# Altium PCB DebugBoard_v3.PcbDoc
Units mm, origin at the board's own origin, x right, y up, seen from the top; angles counter-clockwise.
Board outline 33.02 x 38.74 mm, 2 copper layers (Top Layer, Bottom Layer), stack 2.12 mm thick; 14 components, 13 nets, 68 pads, 79 vias.
Unrouted connection lines stored in the file: 18.
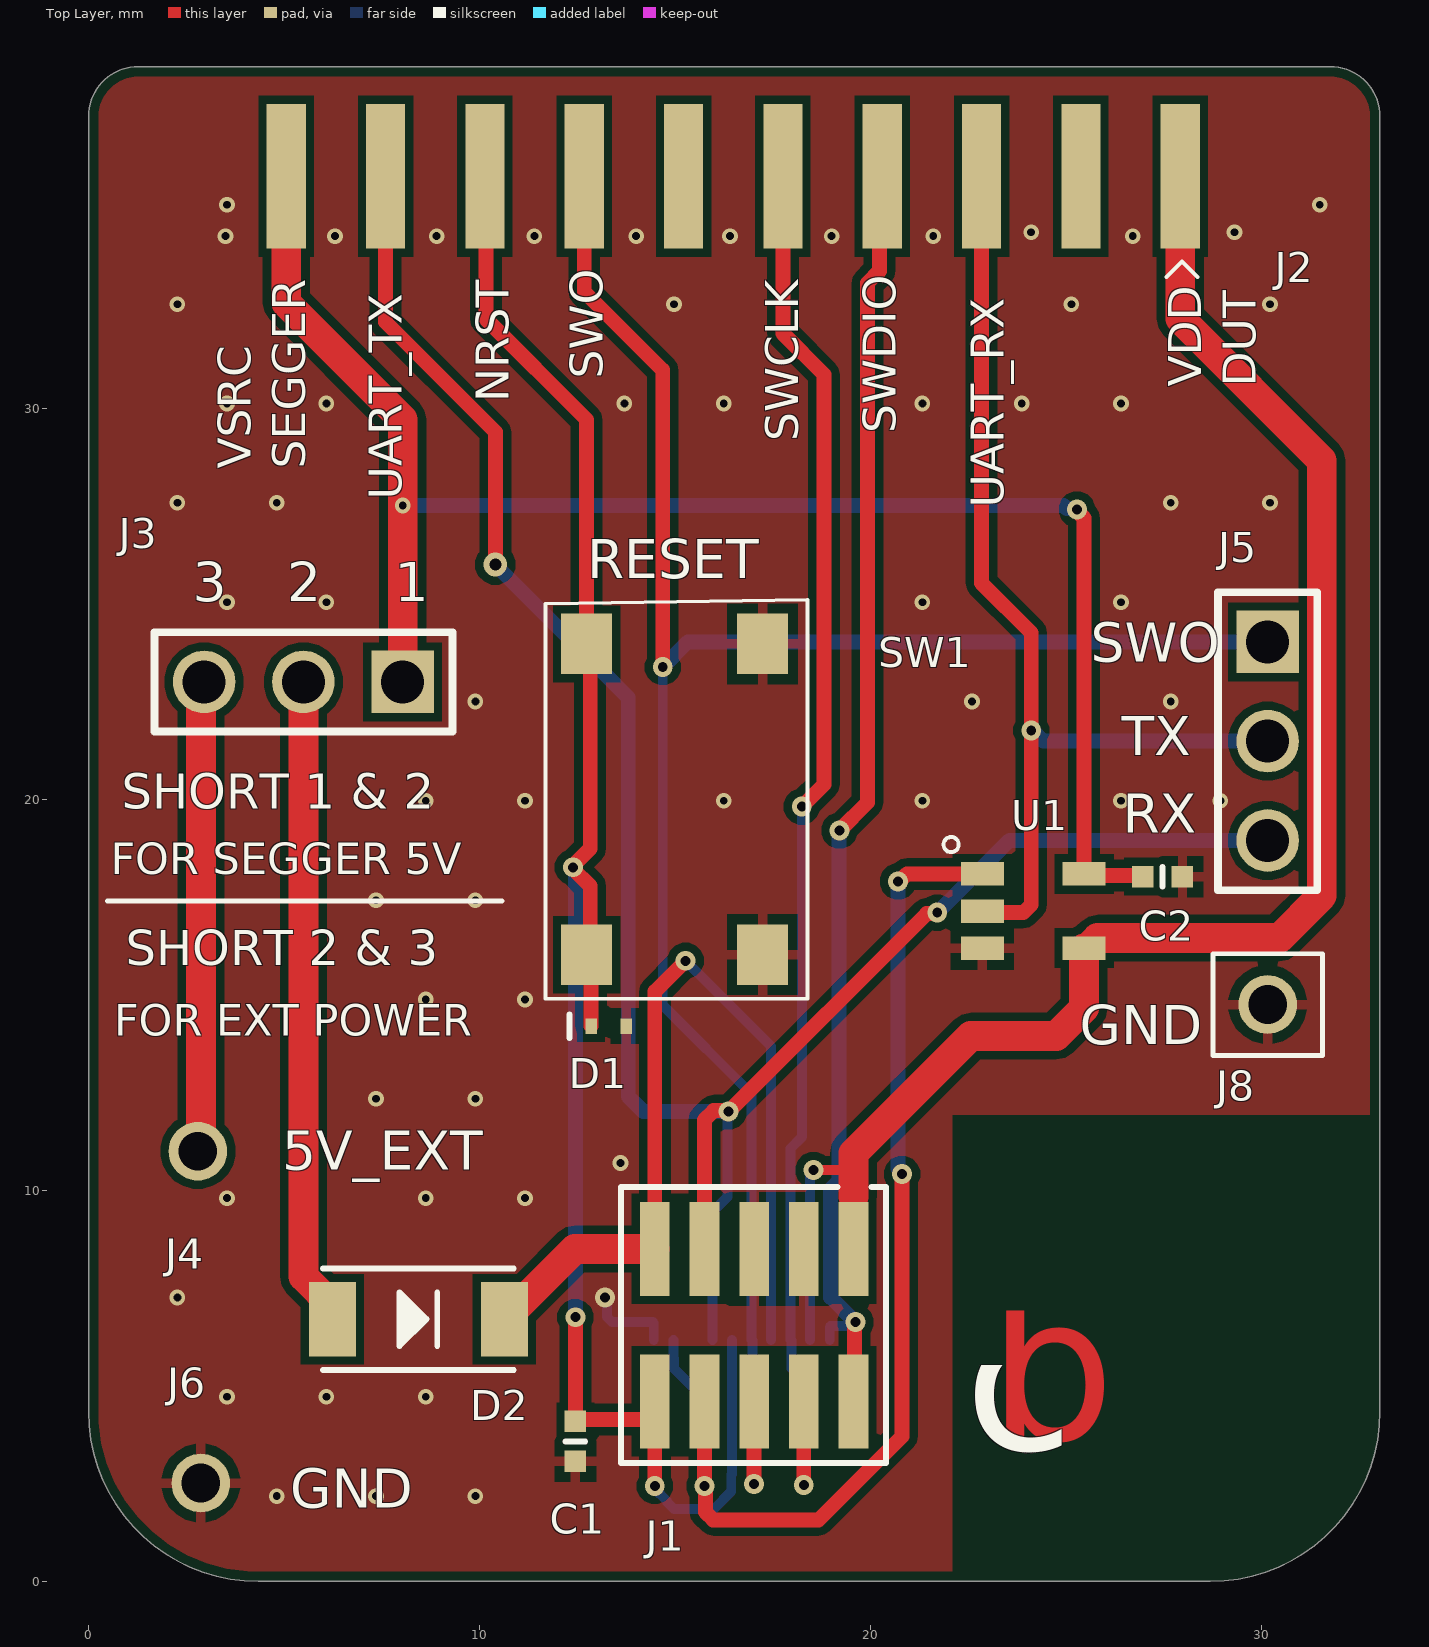
[diagram p0: Top Layer view]
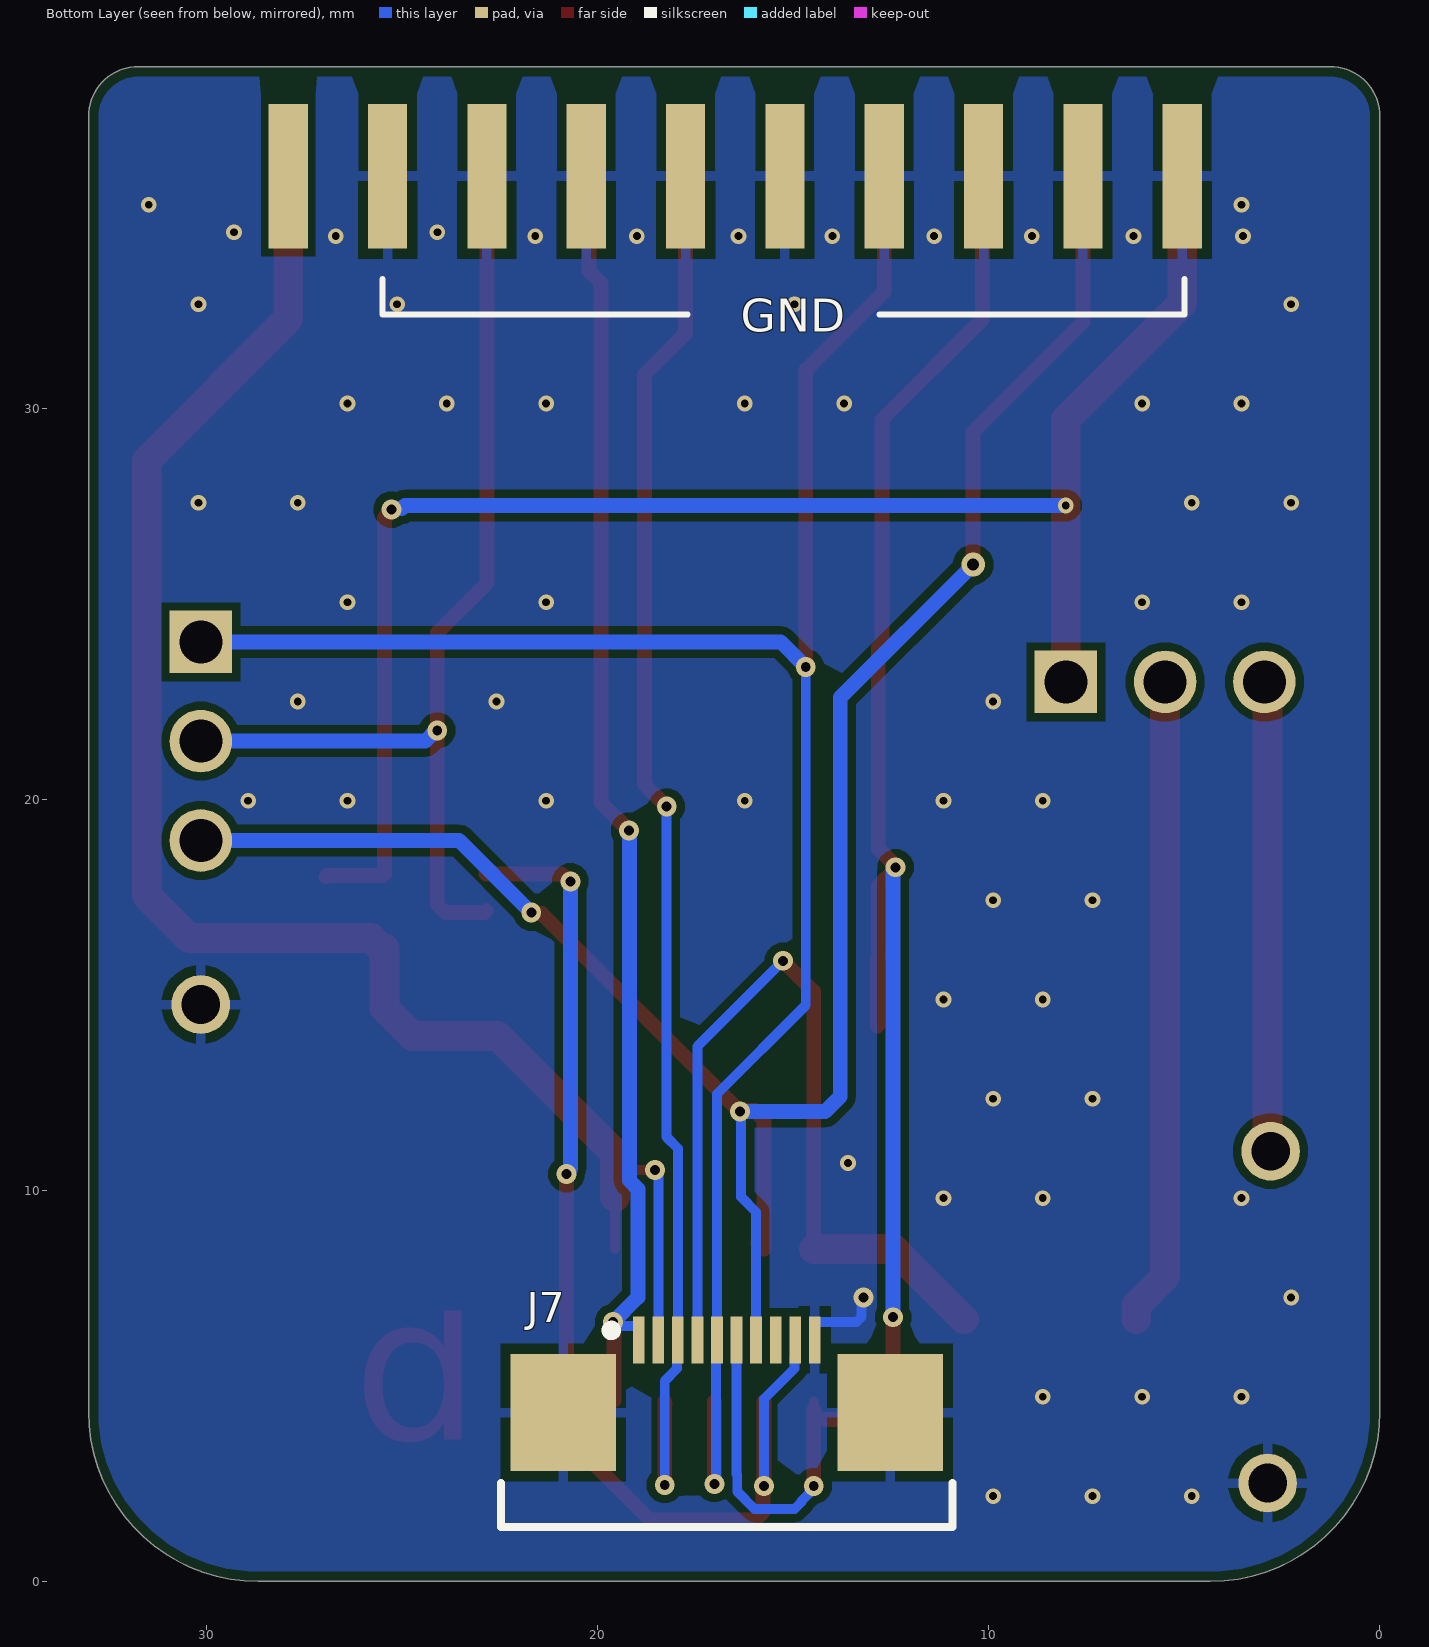
[diagram p1: Bottom Layer view, seen from below]
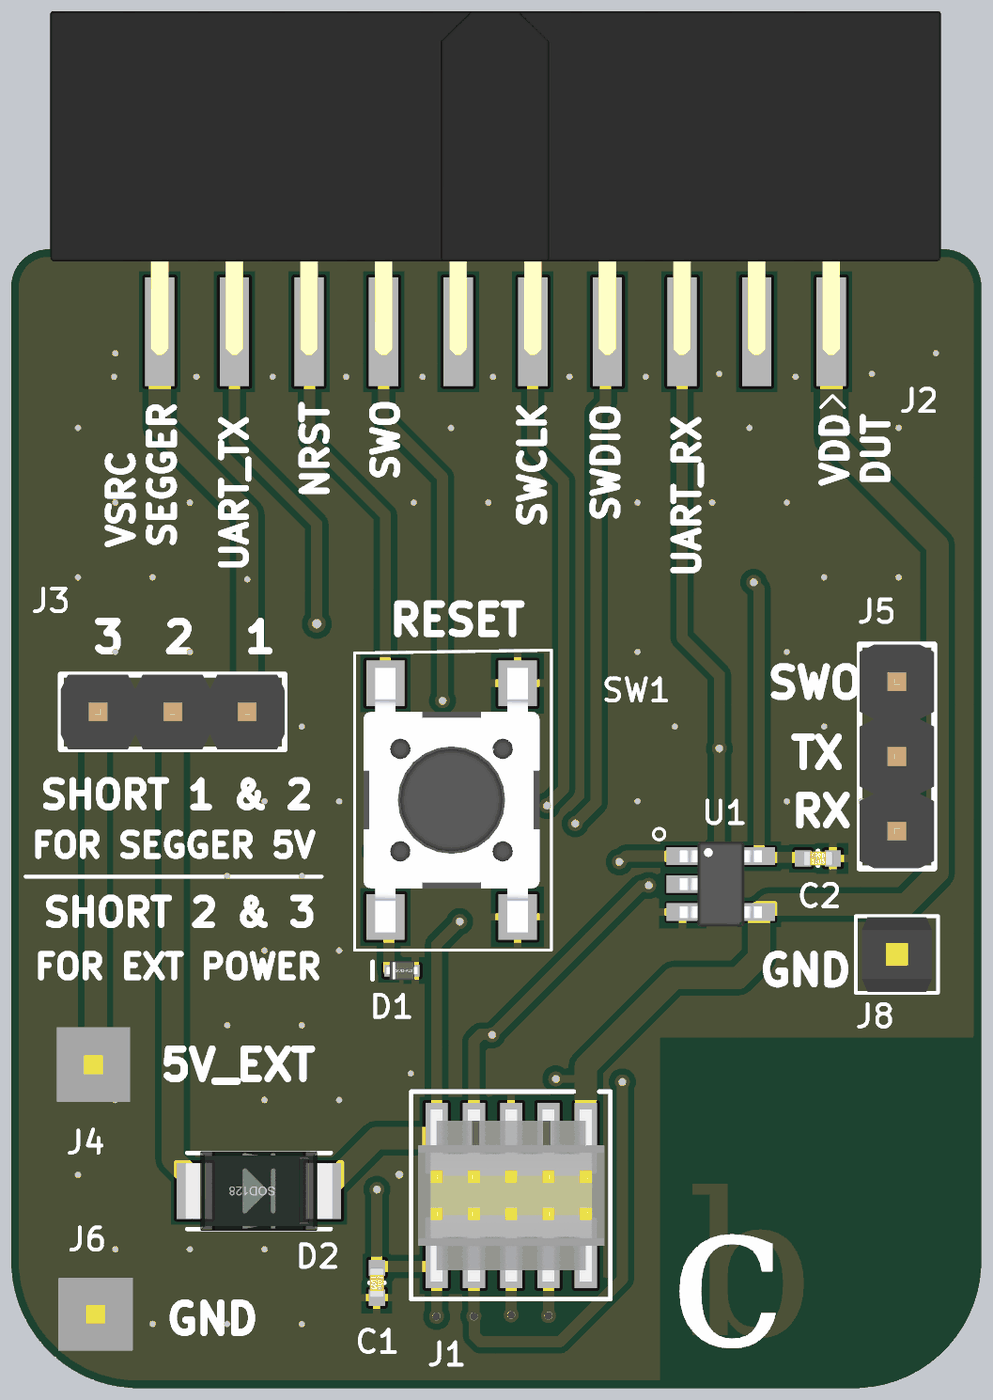
[diagram p2: 3D render of the assembled board from above, using the file's embedded part models]

## Layer stack, top to bottom
Top Solder: solder mask 0.0102, Solder Resist, Dk 3.5
Top Layer: signal copper 0.0356
Dielectric 1: dielectric 2.0486, FR-4, Dk 4.8
Bottom Layer: signal copper 0.0356
Bottom Solder: solder mask 0.0102, Solder Resist, Dk 3.5

## Board outline
0,4.336 0,37.465 cw(c1.27,37.465) 1.27,38.735 31.75,38.735 cw(c31.75,37.465) 33.02,37.465 33.02,4.336 cw(c28.684,4.336) 28.684,0 4.336,0 cw(c4.336,4.336)

## Design rules (kind name [scope] priority, off if disabled: settings)
BoardOutlineClearance [All] p1: gap=0.254 ignorepadtopadclearanceinfootprint=FALSE
Clearance [All] p1: gap=0.204 ignorepadtopadclearanceinfootprint=FALSE except(0.2: SMDPad-SMDPad)
DiffPairsRouting [All] p1: maxlimit=0.254 minlimit=0.064 mostfreqgap=0.127 toplayer_minwidth=0.178 toplayer_maxwidth=0.457 toplayer_prefwidth=0.457 bottomlayer_minwidth=0.178 bottomlayer_maxwidth=0.457 bottomlayer_prefwidth=0.457 impedanceprofiledriven=TRUE maxuncoupledlength=12.7
HoleSize [All] p1: absolutevalues=TRUE maxlimit=5 minlimit=0.153 maxpercent=80.000 minpercent=20.000
MinimumSolderMaskSliver [All] p1: minsoldermaskwidth=0.025
PolygonConnect [All] p1: thpad.connectstyle=Relief thpad.reliefconductorwidth=0.254 thpad.reliefentries=4 thpad.polygonreliefangle="90 Angle" thpad.airgapwidth=0.254 smdpad.connectstyle=Relief smdpad.reliefconductorwidth=0.254 smdpad.reliefentries=4 smdpad.polygonreliefangle="90 Angle" smdpad.airgapwidth=0.254 via.connectstyle=Direct via.reliefconductorwidth=0.254 via.reliefentries=4 via.polygonreliefangle="90 Angle" via.airgapwidth=0.254
RoutingVias [All] p1: holewidth=0.305 width=0.61 viastyle="Through Hole" minholewidth=0.254 minwidth=0.508 maxholewidth=0.5 maxwidth=1.27
SilkToSolderMaskClearance [IsPad] p1: minsilkscreentomaskgap=0.025 clearancetoexposedcopper=TRUE
SolderMaskExpansion [All] p1: expansion=0.102 istentingtop=FALSE
SupplyNets "Schematic Supply Nets_4" [InNet('GND')] p1: voltage=0.000
SupplyNets "Schematic Supply Nets_3" [InNet('VSRC_EXT')] p2: voltage=0.000
SupplyNets "Schematic Supply Nets_2" [InNet('VDD_DUT')] p3: voltage=0.000
SupplyNets "Schematic Supply Nets_1" [InNet('VSRC')] p4: voltage=0.000
SupplyNets "Schematic Supply Nets" [InNet('VSRC_SEGGER')] p5: voltage=0.000
Width [All] p1: maxlimit=25.4 minlimit=0.204 preferedwidth=0.254 minimp=50.000000 maximp=50.000000 favimp=50.000000
26 further rules are at their usual default settings.

## Components (designator, comment, footprint, x,y, rotation, side; value= is the part's Value field where it differs from the comment)
C1 "GCM155R71H104KE02D" CAP-0402 12.446,3.581 r90 top value=0.1µF
C2 "GCM155R71H104KE02D" CAP-0402 27.463,18.019 r180 top value=0.1µF
D1 "CPDQ3V3U-HF" DIODE-SOD923f 13.3,14.2 r180 top
D2 "PMEG3010EP,115" DIODE-SOD128 8.433,6.706 r0 top
J1 "FTSH-105-01-L-DV-K" HDR-V-2X5-M 17.018,6.553 r270 top
J2 "SFH11-PBPC-D10-ST-BK" HDR-V-2X10-F-2.54MM 16.485,36.932 r0 top
J3 "61300311121" HDR-V-1X3 5.493,23 r180 top
J4 "75160-101-01LF" HDR-V-1X1-M 2.794,11 r270 top
J5 "61300311121" HDR-V-1X3 30.15,21.486 r270 top
J6 "75160-101-01LF" HDR-V-1X1-M 2.87,2.515 r0 top
J7 "68711014022" CONN-R-FPC-10P-WURTH 16.702,3.618 r180 bottom
J8 "75160-101-01LF" HDR-V-1X1-M 30.15,14.75 r0 top
SW1 "PTS645SK50SMTR92 LFS" BTN-SPST-PTS645SK50SMTR92 14.986,20 r90 top
U1 "MAX4516EUK+T" IC-SOT-23-5 24.155,17.142 r0 top

## Footprints (in the part's own frame and the unit in brackets; to place one, negate y for a bottom-side part, rotate by r counter-clockwise, add the part's x,y. Pads: shape width x height; smd on the part's side, far side on the other; paste and mask are expansions set on the pad)
BTN-SPST-PTS645SK50SMTR92 [mm]
  rect 1.55x1.3 smd: 1(-3.975,2.25) 2(3.975,2.25) 3(-3.975,-2.25) 4(3.975,-2.25)
  silkscreen extent -5.1,-3.4 5.1,3.3, body extent -4.5,-3 4.5,3, height 5.1
CAP-0402 [mm]
  rect 0.55x0.55 smd: 1(-0.508,0) 2(0.508,0)
  silkscreen extent 0,-0.25 0,0.25, body extent -0.5,-0.25 0.5,0.25, height 0.5
CONN-R-FPC-10P-WURTH [mm]
  rect 0.3x1.2 smd: 1(-2.25,2.56) 2(-1.75,2.56) 3(-1.25,2.56) 4(-0.75,2.56) 5(-0.25,2.56) 6(0.25,2.56) 7(0.75,2.56) 8(1.25,2.56) 9(1.75,2.56) 10(2.25,2.56)
  rect 2.7x3 smd: ME1(-4.18,0.7) ME2(4.18,0.7)
  silkscreen extent -5.77,-2.22 5.78,2.92, body extent -5.7,-2.15 5.7,2.95, height 2.1
DIODE-SOD128 [mm]
  rect 1.2x1.9 smd: 1(2.2,0) 2(-2.2,0)
  silkscreen extent -2.44,-1.3 2.44,1.3, body extent -2.5,-1.35 2.5,1.35, height 1.1
DIODE-SOD923f [mm]
  rect 0.3x0.4 smd: 1(0.45,0) 2(-0.45,0)
  silkscreen extent 1,-0.3 1,0.3, body extent -0.53,-0.32 0.52,0.32, height 0.43
HDR-V-1X1-M [mm]
  round 1.5 hole 0.99: 1(0,0)
  body extent -1.27,-1.24 1.27,1.24, height 12.7
HDR-V-1X3 [mm]
  rect 1.6x1.6 hole 1.1: 1(-2.54,0)
  round 1.6 hole 1.1: 2(0,0) 3(2.54,0)
  silkscreen extent -3.81,-1.27 3.81,1.27, body extent -3.81,-1.27 3.81,1.27, height 8.55
HDR-V-2X5-M [mm] "JTAG"
  rect 2.4x0.76 smd: 1(-1.95,2.54) 2(1.95,2.54) 3(-1.95,1.27) 4(1.95,1.27) 5(-1.95,0) 6(1.95,0) 7(-1.95,-1.27) 8(1.95,-1.27) 9(-1.95,-2.54) 10(1.95,-2.54)
  silkscreen extent -3.53,-3.4 3.53,3.38, body extent -2.92,-3.17 2.92,3.17, height 6.16
HDR-V-2X10-F-2.54MM [mm]
  rect 1x3.7 smd: 1(11.43,-1) 3(8.89,-1) 5(6.35,-1) 7(3.81,-1) 9(1.27,-1) 11(-1.27,-1) 13(-3.81,-1) 15(-6.35,-1) 17(-8.89,-1) 19(-11.43,-1)
  rect 1x3.7 smd far side: 2(11.43,-1) 4(8.89,-1) 6(6.35,-1) 8(3.81,-1) 10(1.27,-1) 12(-1.27,-1) 14(-3.81,-1) 16(-6.35,-1) 18(-8.89,-1) 20(-11.43,-1)
  silkscreen extent 11.08,-3.58 11.88,-3.18, body extent -15.16,-1.8 15.16,9.9, height 3.04
IC-SOT-23-5 [mm]
  rect 1.1x0.6 smd mask+0.07: 1(-1.3,0.95) 2(-1.3,0) 3(-1.3,-0.95) 4(1.3,-0.95) 5(1.3,0.95)
  silkscreen extent -2.29,1.51 -1.91,1.89, body extent -1.4,-1.45 1.4,1.45, height 1.45

## Part data
C1 C2: library part CAP-0.1uF-50V-0402, "CAP CER 0.1UF 50V X7R 0402 10%", Capacitance=100nF, Case Code (Imperial)=0402, Case Code (Metric)=1005, Dielectric=X7R, Manufacturer 1=Murata, Max Operating Temperature=125°C, Min Operating Temperature=-55°C, Package Quantity=10000, Ratings=AEC-Q200, Supplier Part Number 1=490-10672-1-ND, Tolerance=10%, Voltage Rating=50V, Case/Package=0402, ComponentLink1Description=http://www.mouser.com/ds/2/281/c03e-806517.pdf?src-supplier=Mouser, ComponentLink1URL=http://www.mouser.com/ds/2/281/c03e-806517.pdf?src-supplier=Mouser, ComponentLink2Description=http://www.farnell.com/datasheets/2079122.pdf?src-supplier=Farnell, ComponentLink2URL=http://www.farnell.com/datasheets/2079122.pdf?src-supplier=Farnell, ComponentLink3Description=http://www.farnell.com/datasheets/2079122.pdf?src-supplier=Newark, ComponentLink3URL=http://www.farnell.com/datasheets/2079122.pdf?src-supplier=Newark, ComponentLink4Description=http://www.farnell.com/datasheets/2079122.pdf?src-supplier=Element14, ComponentLink4URL=http://www.farnell.com/datasheets/2079122.pdf?src-supplier=Element14, ComponentLink5Description=http://search.murata.co.jp/Ceramy/image/img/A01X/partnumbering_e_02.pdf?src-supplier=Digi-Key, ComponentLink5URL=http://search.murata.co.jp/Ceramy/image/img/A01X/partnumbering_e_02.pdf?src-supplier=Digi-Key, Height=0.5mm, Lead Free="Lead Free", Length=0.039inch, Manufacturer Part Number 1=GCM155R71H104KE02D, Mount="Surface Mount", Packaging="Tape and Reel", Pricing 1="1=0.10000, 10=0.06100, 100=0.02730, 500=0.01952, 1000=0.01533, 2500=0.01394, 5000=0.01282 (USD)", REACH SVHC="No SVHC", RoHS=Yes, Stock 1=254896, Supplier 1=Digi-Key, Termination=SMD/SMT, Thickness=0.022inch, Voltage Rating (DC)=50V, Weight=0.000212oz, Width=0.5mm
D1: library part DIODE-TVS-3.3V-SOD923F, "TVS DIODE 3.3V 10.4V SOD923F", Breakdown Voltage=5V, Clamping Voltage=14.1V, Manufacturer 1=Comchip, Max Operating Temperature=150°C, Min Operating Temperature=-55°C, Package Quantity=8000, Peak Pulse Current=9.8A, Peak Pulse Power=102W, Power Line Protection=No, Resistor Type=Zener, Reverse Standoff Voltage=3.3V, Supplier Part Number 1=641-1477-1-ND, Category="TVS Diodes", ComponentLink1Description=https://datasheet.ciiva.com/6578/cpdq3v3u-hf-6578247.pdf?src-supplier=Digi-Key, ComponentLink1URL=https://datasheet.ciiva.com/6578/cpdq3v3u-hf-6578247.pdf?src-supplier=Digi-Key, ComponentLink2Description=https://datasheet.ciiva.com/12545/cpdq3v3u-hf-216634-12545533.pdf?src-supplier=Mouser, ComponentLink2URL=https://datasheet.ciiva.com/12545/cpdq3v3u-hf-216634-12545533.pdf?src-supplier=Mouser, Diode Type=ZENER, Manufacturer Part Number 1=CPDQ3V3U-HF, Min Breakdown Voltage=5V, Mount="Surface Mount", Number of Channels=1, Number of Unidirectional Channels=1, Packaging="Tape and Reel", Pricing 1="1=0.35000, 10=0.29000, 100=0.15360, 500=0.10106, 1000=0.06872, 2000=0.06199 (USD)", RoHS=Yes, RoHS Compliant=Yes, Series=-, Stock 1=9425, Supplier 1=Digi-Key, Termination=SMD/SMT
D2: library part DIODE-SCHOTTKY-30V-1A-SOD128, "DIODE SCHOTTKY 30V 1A SOD128", Base Part Number=PMEG3010, Capacitance @ Vr, F="170pF @ 1V, 1MHz", Current - Average Rectified (Io)=1A, Manufacturer 1="Nexperia USA Inc.", Operating Temperature - Junction="150°C (Max)", Package / Case=SOD-128, Reverse Voltage=30V, Supplier Device Package=CFP5, Supplier Part Number 1=1727-5408-1-ND, Category="Discrete Semiconductor Products", ComponentLink1Description=https://assets.nexperia.com/documents/data-sheet/PMEG3010EP.pdf, ComponentLink1URL=https://assets.nexperia.com/documents/data-sheet/PMEG3010EP.pdf, Diode Type=Schottky, Manufacturer Part Number 1=PMEG3010EP,115, Mounting Type="Surface Mount", Packaging="Tape & Reel (TR)", Part Status=Active, Pricing 1="3000=0.11556, 6000=0.10856, 15000=0.10155, 30000=0.09338 (USD)", RoHS="RoHS Compliant", Speed="Fast Recovery =< 500ns, > 200mA (Io)", Stock 1=0, Supplier 1=Digi-Key
J1: library part HDR-V-2X5-M-JTAG, "CONN HEADER 10 POS DUAL .05\" SMD", Colour=Black, Manufacturer=Samtec, Max Current Rating=1.75A, Max Operating Temperature=125°C, Min Operating Temperature=-55°C, Package Quantity=1, Supplier Part Number 1=SAM8799-ND, ComponentLink1Description=https://datasheet.ciiva.com/728/ftsh-1xx-xx-xxx-dv-xxx-mkt-728872.pdf, ComponentLink1URL=https://datasheet.ciiva.com/728/ftsh-1xx-xx-xxx-dv-xxx-mkt-728872.pdf, ComponentLink2Description=https://datasheet.ciiva.com/10245/ftsh-mt-10245272.pdf, ComponentLink2URL=https://datasheet.ciiva.com/10245/ftsh-mt-10245272.pdf, ComponentLink3Description=https://datasheet.ciiva.com/16657/ftsh-mt-16657372.pdf, ComponentLink3URL=https://datasheet.ciiva.com/16657/ftsh-mt-16657372.pdf, ComponentLink4Description=https://datasheet.ciiva.com/22703/ftsh-smt-22703900.pdf, ComponentLink4URL=https://datasheet.ciiva.com/22703/ftsh-smt-22703900.pdf, ComponentLink5Description=https://datasheet.ciiva.com/26936/getdatasheetpartid-175877-26936879.pdf, ComponentLink5URL=https://datasheet.ciiva.com/26936/getdatasheetpartid-175877-26936879.pdf, Connector Type="Male Pin", Contact Material=Bronze, Contact Mating Length=0.12inch, Contact Plating=Nickel,Gold, Depth=3.43mm, Gender=Male, Housing Colour=Black, Housing Material=Polymer, Lead Free="Lead Free", Length=6.35mm, Manufacturer 1=Samtec, Manufacturer Part Number 1=FTSH-105-01-L-DV-K, Mount="Surface Mount", MPN=FTSH-105-01-L-DV-K, Number of Contacts=10, Number of Positions=10, Number of Rows=2, Orientation=Straight, Packaging=Rail/Tube, Pitch=1.27mm, Pricing 1="1=3.13, 10=3, 100=2.5, 500=2.125, 1000=1.8125, 5000=1.625 (USD)", Radiation Hardening=No, REACH SVHC="No SVHC", Row Spacing=0.05inch, Stock 1=7189, Supplier 1=Digi-Key, Termination=Solder
J2: library part HDR-V-2X10-F-2.54MM, "20 Position Header Connector 0.100\" (2.54mm) Through Hole Gold", Color=Black, Manufacturer 1=Sullins, Package Quantity=1, Supplier Part Number 1=S9197-ND, Category="Headers and Wire Housings", ComponentLink1Description=https://datasheet.ciiva.com/754/sfh11-pxxc-dxx-st-xx11160-c-754558.pdf?src-supplier=Digi-Key, ComponentLink1URL=https://datasheet.ciiva.com/754/sfh11-pxxc-dxx-st-xx11160-c-754558.pdf?src-supplier=Digi-Key, Connector Type=Header, Contact Plating=Gold, Contact Type="Female Socket", Lead Free="Lead Free", Manufacturer Part Number 1=SFH11-PBPC-D10-ST-BK, Mount="Through Hole", Number of Positions=20, Number of Rows=2, Packaging=Tray, Pitch=0.1inch, Pricing 1="1=1.15000, 10=0.96800, 80=0.86925, 440=0.71118, 1000=0.63216, 5000=0.57070 (USD)", RoHS=Yes, RoHS Compliant=Yes, Row Spacing=0.1inch, Series=SFH11, Stock 1=51703, Supplier 1=Digi-Key, Termination=Solder
J3 J5: library part HDR-V-1X3-M, "Header, 3-Pin, 0.1\"", Colour=Black, Manufacturer="Wurth Electronics", Supplier Part Number 1=732-5316-ND, ComponentLink1Description=http://www.farnell.com/cad/1737268.pdf, ComponentLink1URL=http://www.farnell.com/cad/1737268.pdf, ComponentLink2Description=http://katalog.we-online.de/em/datasheet/6130xx11121.pdf, ComponentLink2URL=http://katalog.we-online.de/em/datasheet/6130xx11121.pdf, Connector Type="Male Pin", Contact Material=Copper, Contact Mating Length=0.236inch, Contact Plating=Gold, Gender=Male, LatestRevisionDate=17-Jul-2002, LatestRevisionNote="Re-released for DXP Platform.", Lead Free="Lead Free", Manufacturer 1="Wurth Electronics", Manufacturer Part Number 1=61300311121, Mount="Through Hole", MPN=61300311121, Number of Contacts=3, Number of Positions=3, Number of Rows=1, Packaging=Bulk, Pitch=0.1inch, Pricing 1="1=0.13, 10=0.106, 25=0.088, 50=0.074, 100=0.067, 1000=0.061 (USD)", Publisher="Altium Limited", REACH SVHC=Unknown, Stock 1=41782, Supplier 1=Digi-Key, Termination=Solder
J4 J6 J8: library part HDR-V-1X1-M, "BergStik®, Board to Board connector, Unshrouded vertical header, through hole, single Row, 1 position, 2.54mm pitch", Color=Black, Current Rating=3A, Insulation Resistance=5GR, Manufacturer 1="Amphenol ICC / FCI", Package Quantity=1000, Supplier Part Number 1=649-75160-101-01LF, Voltage Rating=1.5kV, Category=Connectors, ComponentLink1Description=https://datasheet.ciiva.com/29149/75160-29149349.pdf?src-supplier=Digi-Key, ComponentLink1URL=https://datasheet.ciiva.com/29149/75160-29149349.pdf?src-supplier=Digi-Key, Connector Type="Male Pin", Contact Gender=Male, Contact Material=Bronze, Contact Mating Length=0.225inch, Contact Plating=Gold,GXT, Contact Post Length=2.54mm, Contact Type="Male Pin", Depth=2.8mm, Gender=Male, Housing Color=Black, Housing Material=Thermoplastic, Length=2.54mm, Manufacturer Part Number 1=75160-101-01LF, Mounting Technology="Through Hole", Number of Contacts=1, Number of Positions=1, Number of Rows=1, Orientation=Straight, Packaging=Bulk, Pitch=2.54mm, Pricing 1="1=0.36000, 10=0.27000, 50=0.27000, 100=0.21400, 1000=0.16800, 10000=0.12900 (USD)", Radiation Hardening=No, RoHS=Yes, Series="BERGSTIK®, MezzSelect™, Basics+", Stock 1=4529, Supplier 1=Mouser, Termination=Solder
J7: library part CONN-R-FPC-10P-0.5MM-WURTH, "CONN FFC FPC 10POS 0.50MM RA", Manufacturer 1="Wurth Electronics", Manufacturer Part Number 1=68711014022
SW1: library part BTN-SPST-PTS645SK50SMTR92, "C & K COMPONENTS - PTS645SK50SMTR92LFS - SWITCH, SPST, 0.05A, 12VDC, SMD, 5MM", Case/Package=SMD/SMT, Color=Red, Contact Resistance=100mR, Current Rating=50mA, Manufacturer 1="ITT C&K", Manufacturer Part Number 1=PTS645SK50SMTR92LFS, Max Operating Temperature=60°C, Max Voltage Rating (DC)=12V, Min Operating Temperature=-20°C, Operating Force=260gf, Package Quantity=1, Supplier Part Number 1=CKN9087CT-ND, Actuator Length=1.55mm, Actuator Material=Nylon,Polyamide,PA66, Actuator Type=Standard, Category="Tactile Switches", ComponentLink1Description=https://datasheet.ciiva.com/29903/getdatasheetpartid-741134-29903854.pdf?src-supplier=Verical, ComponentLink1URL=https://datasheet.ciiva.com/29903/getdatasheetpartid-741134-29903854.pdf?src-supplier=Verical, ComponentLink2Description=https://datasheet.ciiva.com/14920/pts645-14920581.pdf?src-supplier=Digi-Key, ComponentLink2URL=https://datasheet.ciiva.com/14920/pts645-14920581.pdf?src-supplier=Digi-Key, ComponentLink3Description=https://datasheet.ciiva.com/22637/1707731-22637358.pdf?src-supplier=Element14, ComponentLink3URL=https://datasheet.ciiva.com/22637/1707731-22637358.pdf?src-supplier=Element14, Contact Material=Bronze, Contact Plating=Silver, Depth=9mm, Illumination Type=Non-Illuminated,Illuminated, Lead Free="Lead Free", Length=6mm, Max Current Rating=50mA, Mechanical Life=100000Cycles, Mount="Surface Mount", Orientation=Straight, Packaging="Tape and Reel", Pricing 1="1=0.15000, 10=0.14900, 25=0.14120, 100=0.12840, 250=0.12068, 500=0.11042 (USD)", REACH SVHC="No SVHC", RoHS=Yes, RoHS Compliant=Yes, Series=PTS645, Stock 1=52601, Supplier 1=Digi-Key, Switch Function=Off-Mom, Termination="Gull Wing", Throw Configuration=SPST, Voltage Rating (DC)=12V
U1: library part IC-SW-MAX4516, "MAX4516 Series SPST-NO 6V 20 Ohm SMT Analog Switch - SOT-23", Case/Package=SOT-23-5, Dual Supply Voltage=5V, Manufacturer 1=Maxim, Max Dual Supply Voltage=6V, Max Operating Temperature=85°C, Max Power Dissipation=571mW, Max Supply Current=125uA, Min Dual Supply Voltage=1V, Min Operating Temperature=-40°C, On-State Resistance=20R, Operating Supply Current=40uA, Package Quantity=1, Supplier Part Number 1=73Y4225, Category="Decoders and Multiplexers", ComponentLink1Description=https://datasheet.ciiva.com/1673/max4516-max4517-1673360.pdf?src-supplier=Digi-Key, ComponentLink1URL=https://datasheet.ciiva.com/1673/max4516-max4517-1673360.pdf?src-supplier=Digi-Key, ComponentLink2Description=https://datasheet.ciiva.com/1673/max4516-max4517-1673359.pdf?src-supplier=Digi-Key, ComponentLink2URL=https://datasheet.ciiva.com/1673/max4516-max4517-1673359.pdf?src-supplier=Digi-Key, ComponentLink3Description=https://datasheet.ciiva.com/1673/max4516-max4517-1673343.pdf?src-supplier=Digi-Key, ComponentLink3URL=https://datasheet.ciiva.com/1673/max4516-max4517-1673343.pdf?src-supplier=Digi-Key, ComponentLink4Description=https://datasheet.ciiva.com/2979/max4516-max4517-2979725.pdf?src-supplier=Avnet, ComponentLink4URL=https://datasheet.ciiva.com/2979/max4516-max4517-2979725.pdf?src-supplier=Avnet, Manufacturer Part Number 1=MAX4516EUK+T, Mounting Technology="Surface Mount", Number of Channels=1, Operating Supply Voltage=5V, Packaging="Tape and Reel", Pins=5, Pricing 1="1=2.88000, 10=2.60000, 25=2.45000, 50=2.27000, 100=2.09000, 250=1.96000, 500=1.71000, 1000=1.47000 (USD)", Radiation Hardening=No, RoHS=Yes, RoHS Compliant=Yes, Series=-, Stock 1=1593, Supplier 1=Newark, Supply Type=Dual, Throw Configuration=SPST, Turn-Off Delay Time=75ns, Turn-On Delay Time=100ns, Weight=0.001058oz

## Via types
v1: diameter 0.4, hole 0.2, Top Layer to Bottom Layer, tented both sides, 59 vias
v2: diameter 0.508, hole 0.254, Top Layer to Bottom Layer, tented both sides, 19 vias
v3: diameter 0.61, hole 0.305, Top Layer to Bottom Layer, tented both sides, 1 vias

## Nets (pads, with @x,y where several pads share a name; then routed paths per layer and width w, separated by ;. In a path a pad name is that pad's centre, name@x,y a point inside that pad or via, vN(x,y) a via of type N, cw(c..) or ccw(c..) an arc to the next point about the centre after c; other vN are vias at no path point)
CONN_UART_TX: J1.8 J7.9 U1.1 | length 29.4
  Top Layer w0.381: J1.8 v2(15.748,2.438) 15.772,2.414 15.772,1.774 15.971,1.575 18.668,1.575 20.803,3.71 v2(20.803,10.414) ; v2(20.7,17.9) 20.734,17.9 20.927,18.092 U1.1
  Bottom Layer w0.254: J7.9 14.952,5.724 14.971,5.705 14.971,5.441 15.748,4.664 v2(15.748,2.438)
  Bottom Layer w0.381: v2(20.7,17.9) 20.7,10.551 20.803,10.448 v2(20.803,10.414)
GND: C1.1 C2.1 D1.2 J1.3 J1.5 J2.4 J2.6 J2.8 J2.10 J2.12 J2.14 J2.16 J2.18 J2.20 J6.1 J7.10 J7.ME1 J7.ME2 J8.1 SW1.3 SW1.4 U1.3 | length 2.2
  Bottom Layer w0.254: v2(13.208,7.264) 13.257,7.216 13.257,6.759 13.386,6.629 14.429,6.629 14.452,6.606 J7.10
  other v1: 4.81,2.18 7.35,2.18 9.89,2.18 3.54,4.72 6.08,4.72 8.62,4.72 2.27,7.26 3.54,9.8 8.62,9.8 11.16,9.8 13.6,10.7 7.35,12.34 9.89,12.34 8.62,14.88 11.16,14.88 7.35,17.42 9.89,17.42 8.62,19.96 11.16,19.96 16.24,19.96 21.32,19.96 26.4,19.96 28.94,19.96 9.89,22.5 22.59,22.5 27.67,22.5 3.54,25.04 6.08,25.04 21.32,25.04 26.4,25.04 2.27,27.58 4.81,27.58 27.67,27.58 30.21,27.58 3.54,30.12 6.08,30.12 13.7,30.12 16.24,30.12 21.32,30.12 23.86,30.12 26.4,30.12 2.27,32.66 14.97,32.66 25.13,32.66 30.21,32.66 3.5,34.4 6.3,34.4 8.9,34.4 11.4,34.4 14,34.4 16.4,34.4 19,34.4 21.6,34.4 26.7,34.4 24.1,34.5 29.3,34.5 3.54,35.2 31.48,35.2
NetD2_1: D2.1 J1.9 J7.4 | length 22.9
  Top Layer w0.381: J1.9 14.478,15.081 v2(15.266,15.869)
  Top Layer w0.762: D2.1 12.43,8.503 J1.9
  Bottom Layer w0.254: v2(15.266,15.869) 17.452,13.683 J7.4
NRST: C1.2 D1.1 J1.10 J2.15 J7.6 SW1.1 SW1.2 | length 48.1
  Top Layer w0.254: C1.2 C1.2@12.497,4.14 ; J1.10@14.225,4.14 14.478,4.393 J1.10
  Top Layer w0.381: J2.15 10.16,35.906 10.16,32.279 12.736,29.703 SW1.2 12.827,23.884 12.827,18.739 12.383,18.295 12.383,18.226 12.827,17.782 12.827,16.116 SW1.1 12.85,15.911 D1.1 ; C1.2 v2(12.446,6.756) ; C1.2@12.497,4.14 J1.10@14.225,4.14 ; v2(14.478,2.438) J1.10@14.478,4.393
  Bottom Layer w0.254: v2(14.478,2.438) 14.478,2.37 14.791,2.057 14.791,2.033 14.971,1.853 15.99,1.853 16.433,2.296 16.433,2.732 16.452,2.751 J7.6
  Bottom Layer w0.381: v2(12.383,18.26) 12.383,18.226 12.446,18.163 v2(12.446,6.756)
SWCLK/TCLK: J1.4 J2.9 J7.3 | length 36.6
  Top Layer w0.254: J1.4@18.212,4.527 J1.4
  Top Layer w0.381: J2.9 17.755,31.911 18.8,30.866 18.8,20.375 v2(18.237,19.812) ; v2(18.288,2.464) J1.4
  Bottom Layer w0.254: v2(18.237,19.812) 18.237,16.561 18.237,11.359 17.952,11.074 J7.3 17.971,6.159 17.971,5.441 18.288,5.124 v2(18.288,2.464)
SWDIO/TMS: J1.2 J2.7 J7.1 | length 33.2
  Top Layer w0.254: v2(19.609,6.629) v2@19.634,6.604
  Top Layer w0.381: v2(19.2,19.2) 19.914,19.914 19.914,33.198 20.226,33.51 20.226,35.863 J2.7 ; J1.2@19.585,4.63 19.585,6.605 v2(19.609,6.629)
  Bottom Layer w0.254: J7.1 18.952,6.512 18.975,6.535 19.445,6.535 19.54,6.629 v2(19.609,6.629)
  Bottom Layer w0.381: v2(19.2,19.2) 19.186,19.186 19.186,10.247 18.975,10.036 18.975,7.263 v2(19.609,6.629)
SWO: J1.6 J2.13 J5.1 J7.5 | length 54
  Top Layer w0.381: J2.13 12.675,32.978 14.681,30.972 v2(14.681,23.383) ; v2(17.018,2.489) J1.6
  Bottom Layer w0.254: v2(14.681,23.383) 14.681,14.732 16.952,12.461 J7.5 16.971,6.159 16.971,2.536 v2(17.018,2.489) ; J5.1@29.507,23.383 J5.1
  Bottom Layer w0.381: v2(14.681,23.383) 15.324,24.026 J5.1
UART_RX: J1.7 J2.17 J5.3 J7.7 | length 55.7
  Top Layer w0.381: J2.17 7.595,32.2 10.4,29.395 v3(10.4,26) ; J1.7@15.9,8.656 J1.7 15.748,11.804 15.983,12.038 16.343,12.038 v2(16.367,12.014) 21.429,17.076 21.676,17.076 v2(21.7,17.1)
  Bottom Layer w0.254: J7.7 15.952,9.45 16.332,9.83 v2@16.332,11.979
  Bottom Layer w0.381: v3(10.4,26) 13.8,22.6 13.8,12.4 14.186,12.014 v2(16.367,12.014) v2@16.332,11.979 ; v2(21.7,17.1) 23.546,18.946 J5.3
UART_TX: J2.5 J5.2 U1.2 | length 26.7
  Top Layer w0.381: J2.5 22.835,25.527 24.105,24.257 v2(24.105,21.757) 24.105,17.305 23.9,17.1 22.898,17.1 U1.2
  Bottom Layer w0.381: v2(24.105,21.757) 24.139,21.757 24.41,21.486 J5.2
VDD_DUT: J1.1 J2.1 J7.2 U1.4 | length 43.4
  Top Layer w0.254: v2(18.537,10.516) 19.431,10.516 19.558,10.389 ; J1.1 19.558,9.83
  Top Layer w0.762: 19.558,9.83 19.558,10.389 19.558,10.947 22.555,13.945 24.745,13.945 25.455,14.655 U1.4 25.543,16.192 25.8,16.449 30.449,16.449 31.535,17.535 31.535,28.665 27.915,32.285 J2.1
  Bottom Layer w0.254: J7.2 18.452,10.362 18.537,10.447 v2(18.537,10.516)
VSRC: D2.2 J3.2 | length 16.8
  Top Layer w0.254: D2.2@6.071,6.543 D2.2
  Top Layer w0.762: J3.2 5.493,7.795 6.233,7.056 D2.2
VSRC_EXT: J3.3 J4.1 | length 12.1
  Top Layer w0.762: J4.1 2.873,11.079 2.873,22.921 J3.3
VSRC_SEGGER: C2.2 J2.19 J3.1 U1.5 | length 42.4
  Top Layer w0.381: v2(25.273,27.407) 25.273,27.372 25.455,27.19 U1.5 25.492,18.056 26.919,18.056 C2.2
  Top Layer w0.762: J2.19 5.055,32.69 8.033,29.711 J3.1
  Bottom Layer w0.381: v1(8.033,27.512) 24.93,27.512 25.011,27.431 25.249,27.431 v2(25.273,27.407)
pads on no net: J2.2 J2.3 J2.11 J7.8

## Polygon pours and split planes (outlines as drawn)
GND on Bottom Layer "NONET_L-01_P-001" (solid, remove dead copper, pour order 0): 0,38.735 33.02,38.735 33.02,0 0,0
GND on Top Layer "NONET_L-01_P-001" (solid, remove dead copper, pour order 1): 0,38.735 33.02,38.735 33.02,0 0,0

## Other copper
Top Layer:
  pour cut-out: 32.751,0.25 32.756,0.254 32.756,11.929 22.088,11.929 22.088,0.245
  text "b" at 23.002,1.794 h9.65

## Silkscreen, mask and mechanical layers (free items; w line width, h text height)
Top Overlay:
  lines w0.127: 0.484,17.398 10.568,17.398
  text "SWO" at 13.146,30.754 h0.85 r90
  text "VDD" at 28.446,30.554 h0.85 r90
  text "DUT" at 29.846,30.554 h0.85 r90
  text "NRST" at 10.746,30.154 h0.85 r90
  text "SWDIO" at 20.646,29.354 h0.85 r90
  text "SWCLK" at 18.146,29.154 h0.85 r90
  text "VSRC" at 4.146,28.454 h0.85 r90
  text "SEGGER" at 5.546,28.454 h0.85 r90
  text "UART_TX" at 8.004,27.654 h0.85 r90
  text "UART_RX" at 23.404,27.454 h0.85 r90
  text "RESET" at 12.754,25.654 h1
  text "3" at 2.667,25.065 h1
  text "2" at 5.08,25.065 h1
  text "1" at 7.834,25.065 h1
  text "SWO" at 25.629,23.518 h1
  text "TX" at 26.416,21.13 h1
  text "SHORT 1 & 2" at 0.854,19.754 h0.9
  text "RX" at 26.441,19.149 h1
  text "FOR SEGGER 5V" at 0.56,18.084 h0.8
  text "SHORT 2 & 3" at 0.954,15.754 h0.9
  text "FOR EXT POWER" at 0.654,13.954 h0.8
  text "GND" at 25.349,13.739 h1
  text "5V_EXT" at 4.954,10.521 h1
  text "GND" at 5.156,1.88 h1
  text "c" at 22.386,1.445 h10.16
Bottom Overlay:
  lines w0.15: 5,33.3 5,32.4 12.8,32.4 ; 17.7,32.4 25.5,32.4 25.5,33.3
  text "GND" at 16.346,31.954 h0.85
Board Outline:
  the board outline again, w0.1